# EAGLE board nrfBreakOut (EAGLE 7.5.0)
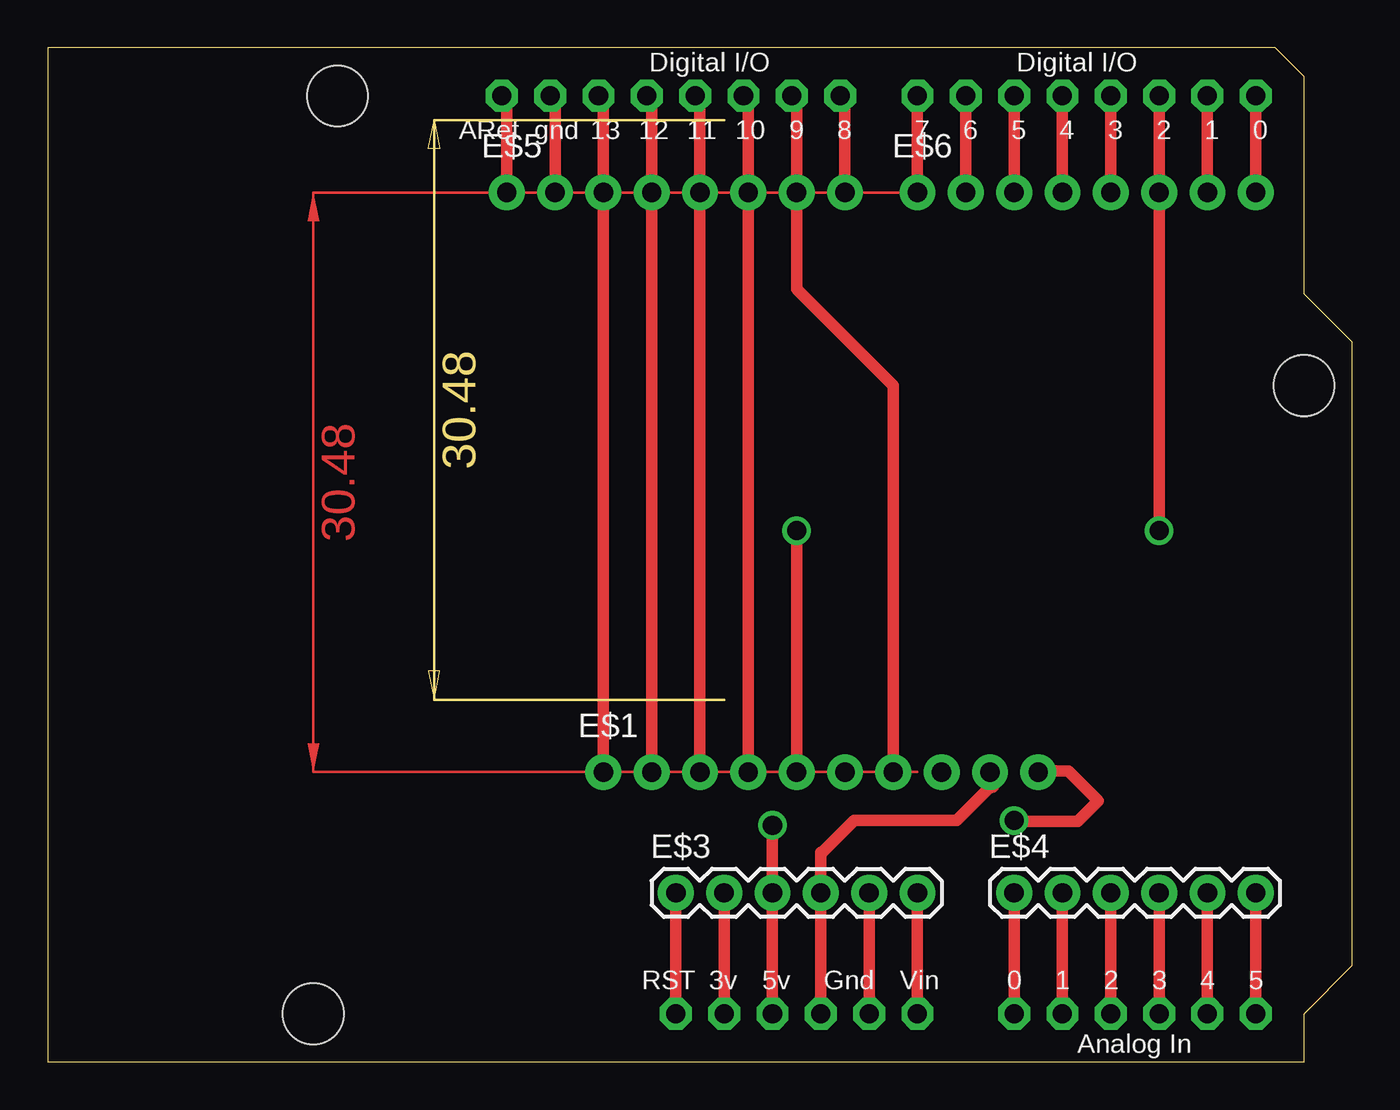
[diagram p0: board, top side]

Size 68.58 x 53.34 mm. Coordinates in mm from the lower left corner, seen from the top.
Copper layers (1*16): Top 0.035mm / dielectric 1.5mm / Bottom 0.035mm
Design rules "default": minimum track width 10mil, minimum drill 24mil, track to track 8mil, track to pad 8mil, pad to pad 8mil, via to via 8mil, smd to smd 8mil, copper to edge 40mil, drill to drill 8mil, minimum pad ring 10mil, minimum via ring 8mil, stop-mask expansion 4mil, vias tented up to drill 0mil, thermal gap 10mil

## Footprints (pad centres in the part's own frame; a part is rotated, then mirrored left to right if it is on the bottom)
1X10_NO_SILK = drill 1.016 pad 1.88: 1 0,0; 2 2.54,0; 3 5.08,0; 4 7.62,0; 5 10.16,0; 6 12.7,0; 7 15.24,0; 8 17.78,0; 9 20.32,0; 10 22.86,0
ARDUINO = drill 1 pad 1.676 octagon: 3V 35.56,2.54; 5V 38.1,2.54; A0 50.8,2.54; A1 53.34,2.54; A2 55.88,2.54; A3 58.42,2.54; A4 60.96,2.54; A5 63.5,2.54; AREF 23.876,50.8; D0 63.5,50.8; D1 60.96,50.8; D2 58.42,50.8; D3 55.88,50.8; D4 53.34,50.8; D5 50.8,50.8; D6 48.26,50.8; D7 45.72,50.8; D8 41.656,50.8; D9 39.116,50.8; D10 36.576,50.8; D11 34.036,50.8; D12 31.496,50.8; D13 28.956,50.8; GND 26.416,50.8; GND1 43.18,2.54; GND2 40.64,2.54; RESET 33.02,2.54; VIN 45.72,2.54 | hole 3.2: 15.24,50.8; 66.04,35.56; 13.97,2.54
1X06 = drill 1.016 pad 1.88: 1 0,0; 2 2.54,0; 3 5.08,0; 4 7.62,0; 5 10.16,0; 6 12.7,0
1X08_NO_SILK = drill 1.016 pad 1.88: 1 0,0; 2 2.54,0; 3 5.08,0; 4 7.62,0; 5 10.16,0; 6 12.7,0; 7 15.24,0; 8 17.78,0

## Placement (x,y rotation side)
E$1  [1X10_NO_SILK]  29.21,15.24 0 top
E$2  [ARDUINO]  0,0 0 top
E$3  [1X06]  33.02,8.89 0 top
E$4  [1X06]  50.8,8.89 0 top
E$5  [1X08_NO_SILK]  24.13,45.72 0 top
E$6  [1X08_NO_SILK]  45.72,45.72 0 top

## Library data of the parts
E$1 E$3-E$6 = SparkFun-Connectors
E$2 = adafruit

## Nets
S$1: E$1.1
S$2: E$1.2
S$3: E$1.3
S$4: E$1.4
S$5: E$5.1
S$6: E$5.2
S$8: E$5.8
S$9: E$2.D7 E$6.1
S$10: E$2.D6 E$6.2
S$11: E$2.D5 E$6.3
S$12: E$2.D4 E$6.4
S$13: E$2.D3 E$6.5
S$14: E$2.D2 E$6.6
S$15: E$2.D1 E$6.7
S$16: E$2.D0 E$6.8
S$17: E$1.7 E$5.7
S$18: E$1.5
S$19: E$2.RESET E$3.1
S$20: E$2.3V E$3.2
S$21: E$2.5V E$3.3
S$23: E$2.GND1 E$3.5
S$24: E$2.VIN E$3.6
S$25: E$2.A0 E$4.1
S$26: E$2.A1 E$4.2
S$27: E$2.A2 E$4.3
S$28: E$2.A3 E$4.4
S$29: E$2.A4 E$4.5
S$30: E$2.A5 E$4.6
S$31: E$2.GND2 E$3.4

## Tracks (layer width: path | path; a pad name or v marks a point on that pad's centre or on a via)
S$1
  Top 0.61: E$1.1 29.21,50.8
S$2
  Top 0.61: E$1.2 31.75,50.8
S$3
  Top 0.61: E$1.3 34.29,50.8
S$4
  Top 0.61: E$1.4 36.83,50.8
S$5
  Top 0.61: E$5.1 24.13,50.8
S$6
  Top 0.61: E$5.2 26.67,50.8
S$7  (via drill 1)
  other vias: 50.8,12.7
S$8
  Top 0.61: E$5.8 41.91,50.8
S$9
  Top 0.61: E$6.1 E$2.D7
S$10
  Top 0.61: E$6.2 E$2.D6
S$11
  Top 0.61: E$6.3 E$2.D5
S$12
  Top 0.61: E$6.4 E$2.D4
S$13
  Top 0.61: E$6.5 E$2.D3
S$14  (via drill 1)
  Top 0.61: E$2.D2 E$6.6 v58.42,27.94
S$15
  Top 0.61: E$6.7 E$2.D1
S$16
  Top 0.61: E$6.8 E$2.D0
S$17
  Top 0.61: E$1.7 44.45,35.56 39.37,40.64 E$5.7 39.37,50.8
S$18  (via drill 1)
  Top 0.61: E$1.5 v39.37,27.94
S$19
  Top 0.61: E$2.RESET E$3.1
S$20
  Top 0.61: E$3.2 E$2.3V
S$21  (via drill 1)
  Top 0.61: E$2.5V E$3.3 v38.1,12.45
S$22
  Top 0.61: 49.62,14.55 47.77,12.71 42.39,12.71 40.71,11.02
  Top 0.813: 49.62,15.15 49.62,14.55
S$23
  Top 0.61: E$3.5 E$2.GND1
S$24
  Top 0.61: E$3.6 E$2.VIN
S$25
  Top 0.61: E$4.1 E$2.A0
S$26
  Top 0.61: E$4.2 E$2.A1
S$27
  Top 0.61: E$4.3 E$2.A2
S$28
  Top 0.61: E$4.4 E$2.A3
S$29
  Top 0.61: E$4.5 E$2.A4
S$30
  Top 0.61: E$4.6 E$2.A5
S$31
  Top 0.61: E$2.GND2 E$3.4 40.64,11.01
S$32
  Top 0.61: 52.12,15.32 53.64,15.32 55.22,13.74 54.13,12.65 50.92,12.65
(copper drawn outside any net)
  shapes: Top area x1